# EAGLE board TeamFlag (EAGLE 9.4.2)
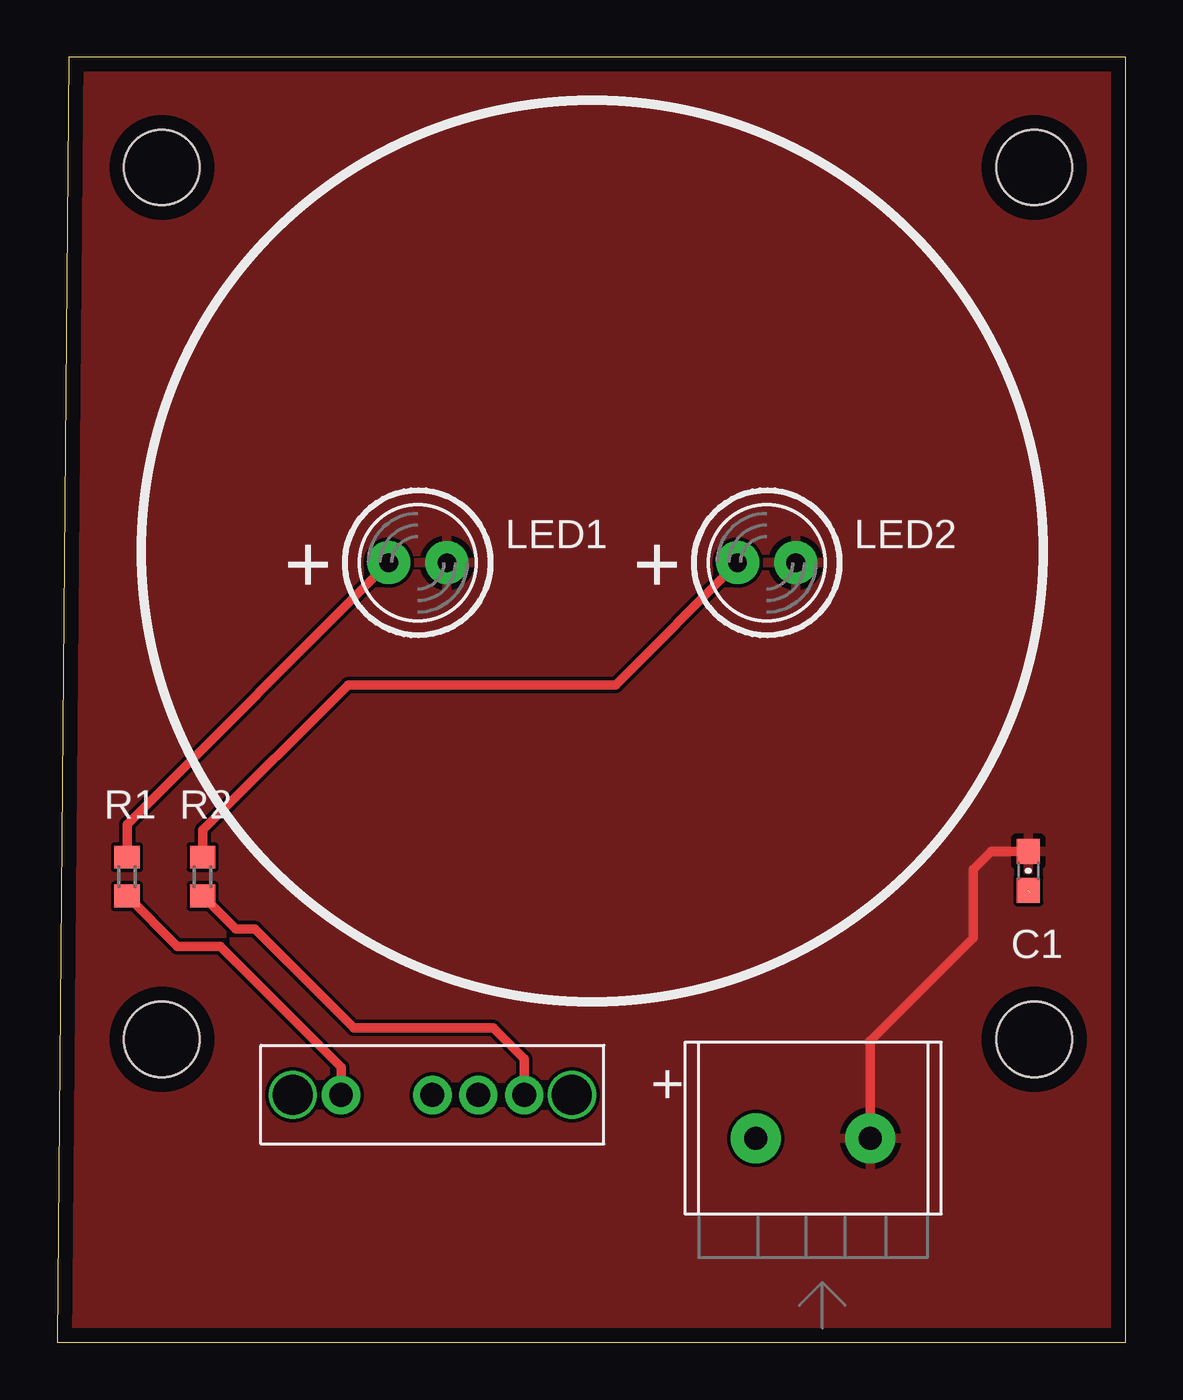
[diagram p0: board, top side]
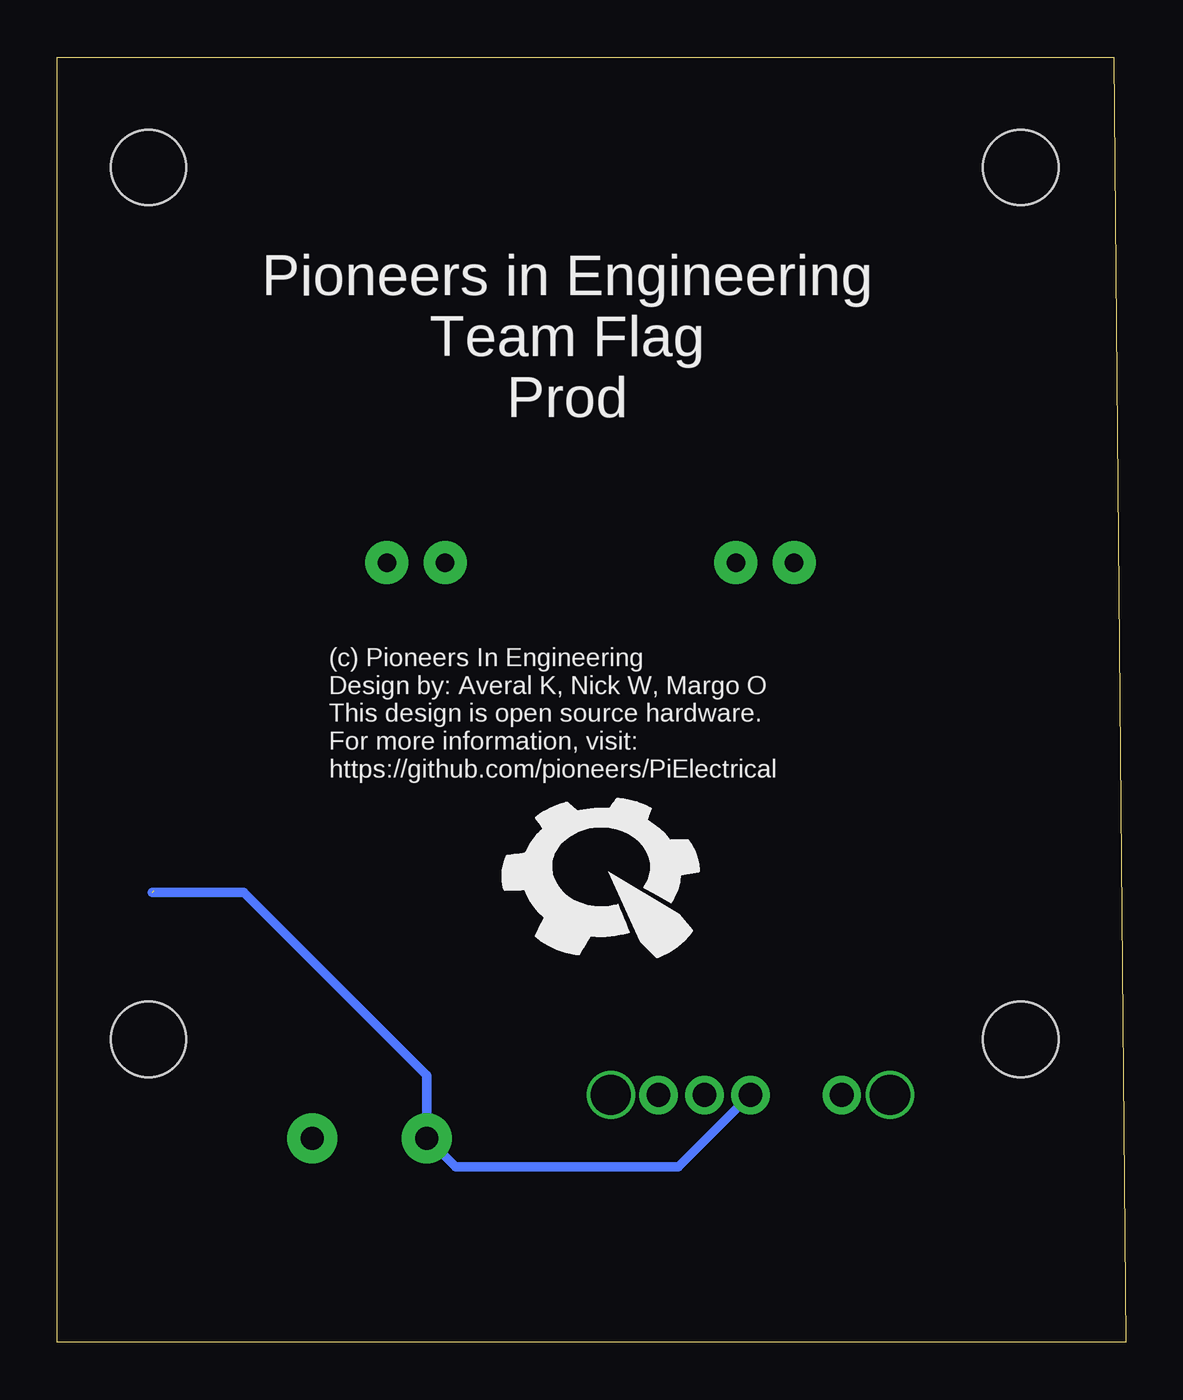
[diagram p1: board, bottom side, seen from below]

Size 46.66 x 56.15 mm. Coordinates in mm from the lower left corner, seen from the top.
Outline: 0,0 46.66,0 46.66,56.15 0.51,56.15 0,0
Copper layers (1*16): Top 2mil / dielectric 9mil / Bottom 2mil
Design rules "pie": minimum track width 6mil, minimum drill 15mil, track to track 6mil, track to pad 6mil, pad to pad 6mil, via to via 6mil, smd to smd 6mil, copper to edge 25mil, drill to drill 7mil, minimum pad ring 7mil, minimum via ring 7mil, stop-mask expansion 3mil, vias tented up to drill 21mil, thermal gap 10mil

## Footprints (pad centres in the part's own frame; a part is rotated, then mirrored left to right if it is on the bottom)
0603-CAP = smd 1.1 x 1: 1 -0.85,0; 2 0.85,0
LED5MM-NOFLAT = drill 0.813 pad 1.88: A -1.27,0; K 1.27,0
R0603 = smd 1 x 1.1: 1 -0.85,0; 2 0.85,0
2PIN_SCREW = drill 1 pad 2.184: P$1 3.1,3.3; P$2 8.1,3.3
SP3T_SLIDE_SWITCH = drill 1.753 pad 1.93: P$3 1.397,2.146; P$4 13.589,2.146 | drill 1.041 pad 1.676: PIN1 3.505,2.146; PIN2 7.493,2.146; PIN3 9.5,2.146; PIN4 11.506,2.146
STAND-OFF = hole 3.302: 0,0

## Placement (x,y rotation side)
C1  0.1uF  [0603-CAP]  42.42,20.6 270 top
LED1  Yellow  [LED5MM-NOFLAT]  15.75,34.06 0 top
LED2  Blue  [LED5MM-NOFLAT]  30.99,34.06 0 top
R1  130  [R0603]  3.05,20.34 270 top
R2  130  [R0603]  6.35,20.34 270 top
ST1  2PIN_SCREW  [2PIN_SCREW]  27.42,5.61 0 top
U$2  SP3T_SLIDE_SWITCH  [SP3T_SLIDE_SWITCH]  8.89,8.66 0 top
U$3  [STAND-OFF]  4.57,51.33 0 top
U$4  [STAND-OFF]  42.67,51.33 0 top
U$5  [STAND-OFF]  4.57,13.23 0 top
U$6  [STAND-OFF]  42.67,13.23 0 top
U$7  [PIE-LOGO-SMALL]  22.61,20.6 0 bottom

## Library data of the parts
C1 = pie; PIE-INT-REF-NUM: CAPACITOR-GENERIC
LED1 LED2 = pie; PIE-INT-REF-NUM: LED
R1 R2 = pie; DESCRIPTION: RESISTOR, American symbol; DISTRIBUTOR: DigiKey; MANUFACTURER: Rohm Semiconductor; NOTES: Cut Tape; PACKAGE: R0603
ST1 U$2-U$7 = pie

## Nets
GND: C1.1 LED1.K LED2.K ST1.P$2
N$2: LED1.A R1.1
N$3: LED2.A R2.1
PIN1: R1.2 U$2.PIN1
PIN4: R2.2 U$2.PIN4
VCC: C1.2 ST1.P$1 U$2.PIN2

## Tracks (layer width: path | path; a pad name or v marks a point on that pad's centre or on a via)
GND
  Top 0.406: ST1.P$2 35.52,13.17 40.01,17.66 40.01,20.66 40.8,21.45 C1.1
  pour Top: 0.25,0 0.25,56.16 46.74,56.16 46.74,0
N$2
  Top 0.406: LED1.A 3.05,22.63 R1.1
N$3
  Top 0.406: R2.1 6.35,22.38 12.7,28.73 24.38,28.73 LED2.A
PIN1
  Top 0.406: U$2.PIN1 12.39,12.01 7.11,17.3 5.25,17.3 R1.2
PIN4
  Top 0.406: U$2.PIN4 20.4,12.39 19.05,13.74 12.95,13.74 8.64,18.06 7.79,18.06 R2.2
VCC  (1 unrouted)
  Top 0.406: 42.33,19.84 C1.2
  Bottom 0.406: U$2.PIN2 19.53,7.66 29.26,7.66 ST1.P$1 30.52,11.67 38.51,19.66 42.51,19.66

## Text on the board
bPlace: Pioneers in Engineering / Team Flag / Prod | (c) Pioneers In Engineering / Design by: Averal K, Nick W, Margo O / This design is open source hardware. / For more information, visit: / https://github.com/pioneers/PiElectrical
tNames: +